# EAGLE board mkf434_ME433_HW2PenguinSchematic (EAGLE 8.1.0)
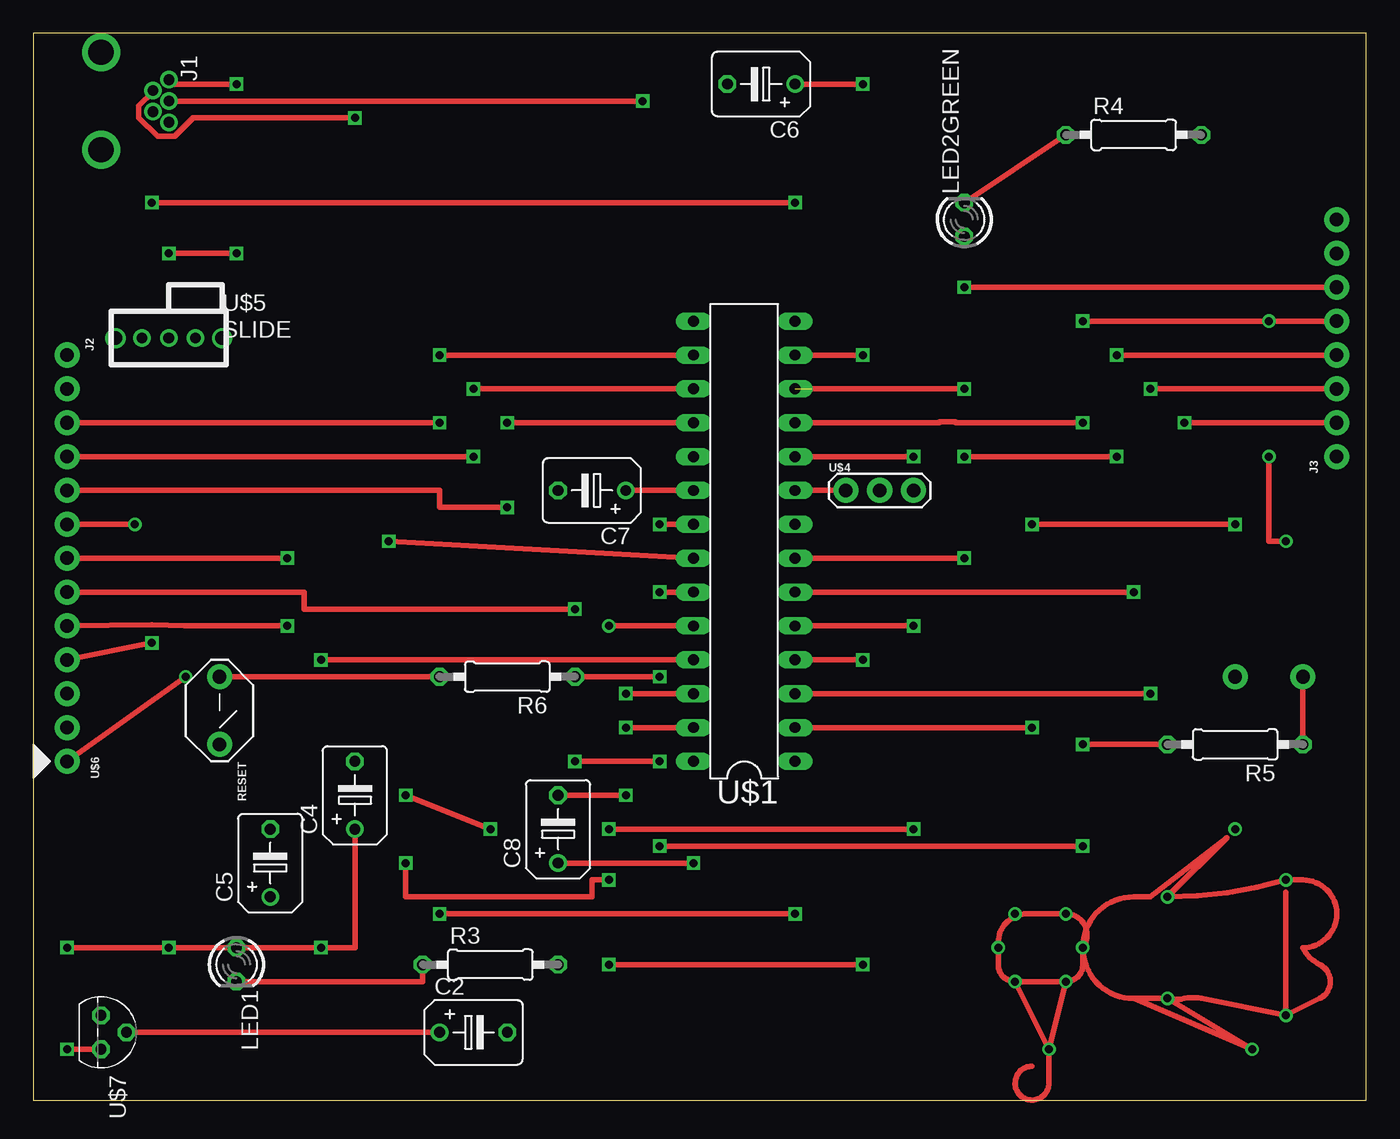
[diagram p0: board, top side]
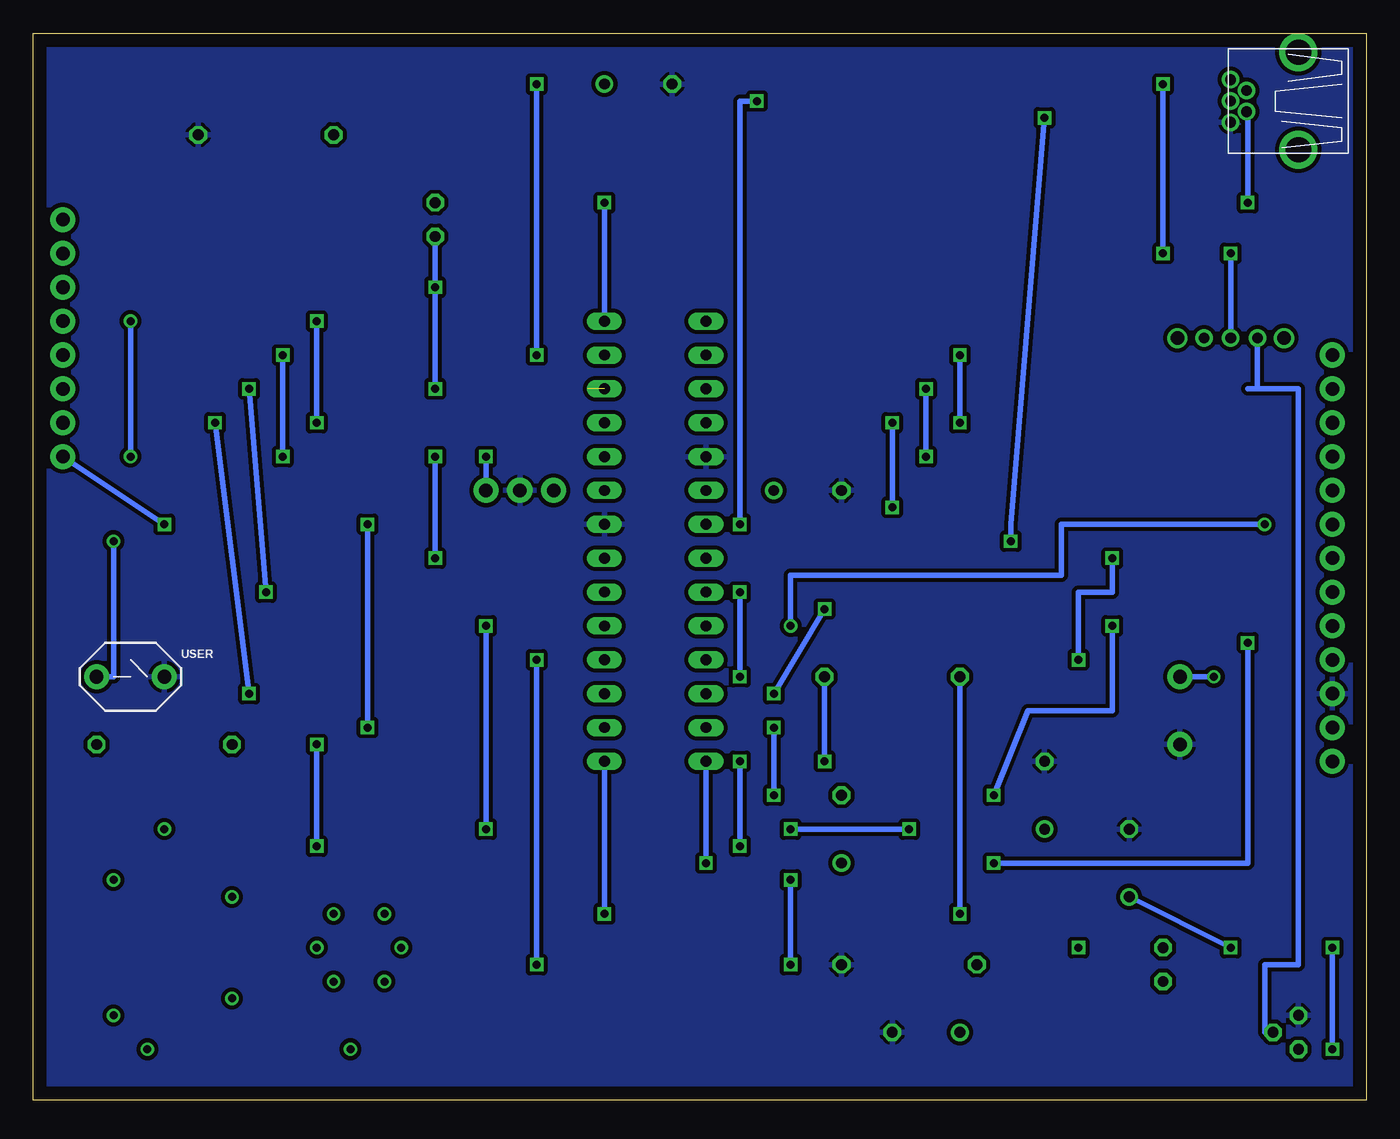
[diagram p1: board, bottom side, seen from below]

Size 100 x 80 mm. Coordinates in mm from the lower left corner, seen from the top.
Outline: 0,0 100,0 100,80 0,80 0,0
Copper layers (1*16): Top 0.035mm / dielectric 1.5mm / Bottom 0.035mm
Design rules "default": minimum track width 10mil, minimum drill 24mil, track to track 8mil, track to pad 8mil, pad to pad 8mil, via to via 8mil, smd to smd 8mil, copper to edge 40mil, drill to drill 8mil, minimum pad ring 10mil, minimum via ring 8mil, stop-mask expansion 4mil, vias tented up to drill 0mil, thermal gap 10mil

## Footprints (pad centres in the part's own frame; a part is rotated, then mirrored left to right if it is on the bottom)
B45181B = drill 0.813: + -2.54,0 | drill 0.813 octagon: - 2.54,0
USB-MB-H = drill 0.8: D+ 5.1,0; D- 3.9,0.8; GND 5.1,-1.6; ID 3.9,-0.8; VBUS 5.1,1.6 | drill 1.9: P$6 0,-3.65; P$7 0,3.65
1X08 = drill 1.016 pad 1.88: 1 0,0; 2 2.54,0; 3 5.08,0; 4 7.62,0; 5 10.16,0; 6 12.7,0; 7 15.24,0; 8 17.78,0
LED3MM = drill 0.813 octagon: A -1.27,0; K 1.27,0
0207/10 = drill 0.813 octagon: 1 -5.08,0; 2 5.08,0
PB = drill 1.016 pad 1.88: 1 -2.54,0; 2 2.54,0
DIL28-3 = drill 0.813 long: 1 -16.51,-3.81; 2 -13.97,-3.81; 3 -11.43,-3.81; 4 -8.89,-3.81; 5 -6.35,-3.81; 6 -3.81,-3.81; 7 -1.27,-3.81; 8 1.27,-3.81; 9 3.81,-3.81; 10 6.35,-3.81; 11 8.89,-3.81; 12 11.43,-3.81; 13 13.97,-3.81; 14 16.51,-3.81; 15 16.51,3.81; 16 13.97,3.81; 17 11.43,3.81; 18 8.89,3.81; 19 6.35,3.81; 20 3.81,3.81; 21 1.27,3.81; 22 -1.27,3.81; 23 -3.81,3.81; 24 -6.35,3.81; 25 -8.89,3.81; 26 -11.43,3.81; 27 -13.97,3.81; 28 -16.51,3.81
OSC = drill 1.016 pad 1.88: 1 -2.54,0; 2 0,0; 3 2.54,0
SLIDE = drill 0.8: 1. -2,0; 2. 0,0; 3. 2,0 | drill 1: P$1 -4,0; P$2 4,0
1X05 = drill 1.016 pad 1.88: 1 0,0; 2 2.54,0; 3 5.08,0; 4 7.62,0; 5 10.16,0
TO92 = drill 0.813 octagon: 1 -1.27,0; 2 0,1.905; 3 1.27,0

## Placement (x,y rotation side)
C2  0.1uF  [B45181B]  33.02,5.08 0 top
C4  0.1uF  [B45181B]  24.13,22.86 90 top
C5  10uF  [B45181B]  17.78,17.78 90 top
C6  0.1uF  [B45181B]  54.61,76.2 180 top
C7  10uF  [B45181B]  41.91,45.72 180 top
C8  0.1uF  [B45181B]  39.37,20.32 90 top
J1  USB-MB-H  [USB-MB-H]  5.08,74.93 0 top
J2  [1X08]  2.54,55.88 270 top
J3  [1X08]  97.79,48.26 90 top
LED1  [LED3MM]  15.24,10.16 270 top
LED2GREEN  [LED3MM]  69.85,66.04 90 top
R3  330  [0207/10]  34.29,10.16 0 top
R4  330  [0207/10]  82.55,72.39 0 top
R5  10k  [0207/10]  90.17,26.67 180 top
R6  10k  [0207/10]  35.56,31.75 180 top
RESET  PB  [PB]  13.97,29.21 270 top
U$1  PIC32MX250F128B  [DIL28-3]  53.34,41.91 90 top
U$4  [OSC]  63.5,45.72 0 top
U$5  SLIDE  [SLIDE]  10.16,57.15 0 top
U$6  PICKIT3  [1X05]  2.54,25.4 90 top
U$7  MCP1702  [TO92]  5.08,5.08 270 top
USER  PB  [PB]  92.71,31.75 0 bottom

## Library data of the parts
C2 C4-C8 J1 R3-R6 RESET U$1 U$4-U$7 USER = HW2_LIB
J2 J3 = HW2_LIB; PROD_ID: CONN-08438
LED1 LED2GREEN = led

## Nets
+3V3: R5.2 R6.1 U$1.23
+5V: U$1.15
A0: J3.1 U$1.2
A1: J3.2 U$1.3
A4/LED: J3.6 LED2GREEN.A U$1.12
B2: J3.3 U$1.6
B3: J3.4 U$1.7
B4/USER: J3.5 R5.1 U$1.11 USER.1
B7: J2.3 U$1.16
B8: J2.4 U$1.17
B9: J2.5 U$1.18
B13: J2.6 U$1.24
B14: J2.7 U$1.25
B15: J2.8 U$1.26
D+: J1.D+ U$1.21
D-: J1.D- U$1.22
GND: C2.- C4.- C5.- C6.- C7.- J1.GND R3.2 R4.2 RESET.2 U$1.8 U$1.19 U$4.2 U$6.3 U$7.1 USER.2
ID: J1.ID U$1.14
MCLR: R6.2 RESET.1 U$1.1 U$6.1
N$1: J1.VBUS U$5.2.
N$2: C2.+ U$5.1. U$7.2
N$3: C4.+ C5.+ LED1.A U$7.3
N$4: LED1.K R3.1
N$5: LED2GREEN.K R4.1
N$6: J2.1
N$7: J2.2
N$10: U$6.2
N$11: C6.+ U$1.13
N$12: C7.+ U$1.20
N$13: C8.+ U$1.28
N$14: J3.7
N$15: J3.8
N$16: C8.- U$1.27
OSC1: U$1.9 U$4.1
OSC2: U$1.10 U$4.3
PGC: U$1.5 U$6.5
PGD: U$1.4 U$6.4

## Tracks (layer width: path | path; a pad name or v marks a point on that pad's centre or on a via)
+3V3  (via drill 0.6)
  Top 0.406: R5.2 v78.74,26.67 | v78.74,19.05 v46.99,19.05 | v46.99,25.4 v40.64,25.4 | R6.1 v46.99,31.75 | v46.99,38.1 U$1.23
  Bottom 0.406: v78.74,26.67 v78.74,19.05 | v46.99,19.05 v46.99,25.4 | v40.64,25.4 R6.1 | v46.99,31.75 v46.99,38.1
A0  (via drill 0.6)
  Top 0.406: v90.17,43.18 v74.93,43.18 | v74.93,27.94 U$1.2
  Bottom 0.406: J3.1 v90.17,43.18 | v74.93,43.18 v74.93,27.94
A1  (via drill 0.6)
  Top 0.406: v83.82,30.48 U$1.3 | J3.2 v86.36,50.8
  Bottom 0.406: v86.36,50.8 v83.82,30.48
A4/LED  (via drill 0.6)  (1 unrouted)
  Top 0.406: v69.85,53.34 58.42,53.34 | J3.6 v69.85,60.96
  Bottom 0.406: LED2GREEN.A v69.85,60.96 v69.85,53.34
B2  (via drill 0.6)
  Top 0.406: J3.3 v83.82,53.34 | v82.55,38.1 U$1.6
  Bottom 0.406: v83.82,53.34 v82.55,38.1
B3  (via drill 0.6)
  Top 0.406: J3.4 v81.28,55.88 | v81.28,48.26 v69.85,48.26 | v69.85,40.64 U$1.7
  Bottom 0.406: v81.28,55.88 v81.28,48.26 | v69.85,48.26 v69.85,40.64
B4/USER  (via drill 0.6)
  Top 0.406: J3.5 v92.71,58.42 v78.74,58.42 | v78.74,50.8 69.21,50.8 69.14,50.88 68.02,50.88 67.95,50.8 U$1.11 | USER.1 R5.1 | v93.98,41.91 92.71,41.91 v92.71,48.26
  Bottom 0.406: v78.74,58.42 v78.74,50.8 | USER.1 93.98,31.75 v93.98,41.91 | v92.71,48.26 v92.71,58.42
B7  (via drill 0.6)
  Top 0.406: v30.48,55.88 U$1.16 | J2.3 v30.48,50.8
  Bottom 0.406: v30.48,50.8 v30.48,55.88
B8  (via drill 0.6)
  Top 0.406: v33.02,53.34 U$1.17 | J2.4 v33.02,48.26
  Bottom 0.406: v33.02,48.26 v33.02,53.34
B9  (via drill 0.6)
  Top 0.406: v35.56,50.8 U$1.18 | J2.5 30.48,45.72 30.48,44.45 v35.56,44.45
  Bottom 0.406: v35.56,44.45 v35.56,50.8
B13  (via drill 0.6)
  Top 0.406: v7.62,43.18 J2.6 | U$1.24 v43.18,35.56
  Bottom 0.406: v43.18,35.56 43.18,39.37 22.86,39.37 22.86,43.18 v7.62,43.18
B14  (via drill 0.6)
  Top 0.406: v21.59,33.02 U$1.25 | v19.05,40.64 J2.7
  Bottom 0.406: v21.59,33.02 21.59,38.1 19.05,38.1 v19.05,40.64
B15  (via drill 0.6)
  Top 0.406: v44.45,30.48 U$1.26 | v40.64,36.83 20.32,36.83 20.32,38.1 J2.8
  Bottom 0.406: v40.64,36.83 v44.45,30.48
D+  (via drill 0.6)
  Top 0.406: J1.D+ v45.72,74.93 | v46.99,43.18 U$1.21
  Bottom 0.406: v45.72,74.93 46.99,74.93 v46.99,43.18
D-  (via drill 0.6)
  Top 0.406: U$1.22 v26.67,41.91 | v24.13,73.66 12.01,73.66 10.62,72.27 9.34,72.27 7.92,73.69 7.92,74.57 8.98,75.63 J1.D-
  Bottom 0.406: v26.67,41.91 26.67,43.18 v24.13,73.66
GND
  pour Bottom (isolate 0.305): 0,80.01 0,0 100.33,0 100.33,80.01
ID  (via drill 0.6)
  Top 0.406: v8.89,67.31 v57.15,67.31
  Bottom 0.406: J1.ID 8.89,74.13 v8.89,67.31 | v57.15,67.31 U$1.14
MCLR  (via drill 0.6)
  Top 0.406: R6.2 RESET.1 | v30.48,13.97 v57.15,13.97 | v11.43,31.75 U$6.1
  Bottom 0.406: R6.2 v30.48,13.97 | v57.15,13.97 U$1.1 | RESET.1 v11.43,31.75
N$1  (via drill 0.6)
  Top 0.406: v10.16,63.5 v15.24,63.5 | v15.24,76.2 10.18,76.2 J1.VBUS
  Bottom 0.406: U$5.2. v10.16,63.5 | v15.24,63.5 v15.24,76.2
N$2
  Top 0.406: U$7.2 C2.+
  Bottom 0.406: U$7.2 7.62,5.08 7.62,10.16 5.08,10.16 5.08,53.34 8.89,53.34 8.16,53.34 U$5.1.
N$3  (via drill 0.6)
  Top 0.406: v2.54,3.81 U$7.3 | v2.54,11.43 v10.16,11.43 LED1.A v21.59,11.43 24.13,11.43 C4.+
  Bottom 0.406: v10.16,11.43 C5.+ | v2.54,11.43 v2.54,3.81
N$4
  Top 0.406: LED1.K 29.21,8.89 R3.1
N$5
  Top 0.406: R4.1 LED2GREEN.K
N$8  (via drill 0.6)
  other vias: 73.66,13.97
N$9  (via drill 0.6)
  Top 0.406: v72.39,11.43 72.39,10.16 arc90 73.66,8.89 77.47,8.89
N$11  (via drill 0.6)
  Top 0.406: C6.+ v62.23,76.2 | v62.23,55.88 U$1.13
  Bottom 0.406: v62.23,76.2 v62.23,55.88
N$12
  Top 0.406: C7.+ U$1.20
N$13  (via drill 0.6)
  Top 0.406: C8.+ v49.53,17.78
  Bottom 0.406: v49.53,17.78 U$1.28
N$16  (via drill 0.6)
  Top 0.406: C8.- v44.45,22.86 | v44.45,27.94 U$1.27
  Bottom 0.406: v44.45,22.86 v44.45,27.94
N$17  (via drill 0.6)
  Top 0.406: v73.66,8.89 76.2,3.81
N$18  (via drill 0.6)
  Top 0.406: 78.74,11.43 78.74,10.16 arc-90 v77.47,8.89 76.2,3.81
N$19  (via drill 0.6)
  Top 0.406: v78.74,11.43 arc90 82.55,7.62 85.09,7.62
N$20  (via drill 0.6)
  Top 0.406: 72.39,11.43 72.39,11.79 arc-90 74.57,13.97 v77.47,13.97 arc-127 78.74,11.43
N$21  (via drill 0.6)
  Top 0.406: 74.93,2.54 arc270 76.2,1.27 v76.2,3.81
N$22  (via drill 0.6)
  Top 0.406: v93.98,6.35 87.63,7.62 arc23 86.36,7.62 arc-23 85.09,7.62 | v93.98,6.35 93.98,15.6 | v93.98,6.35 96.52,7.62 arc127 96.52,10.16 arc-37 95.25,11.43
N$23  (via drill 0.6)
  Top 0.406: v93.98,16.51 95.25,16.51 arc-180 95.25,11.43
N$24  (via drill 0.6)
  Top 0.406: 78.74,11.43 arc-90 82.55,15.24 83.82,15.24 89.53,19.68 v85.09,15.24 arc16 93.98,16.51
N$25  (via drill 0.6)
  Top 0.406: v85.09,7.62 91.44,3.81 82.55,7.62
N$26  (via drill 0.6)
  other vias: 91.44,3.81
N$27  (via drill 0.6)
  other vias: 90.17,20.32
OSC1
  Top 0.406: U$4.1 U$1.9
OSC2  (via drill 0.6)
  Top 0.406: U$1.10 v66.04,48.26
  Bottom 0.406: v66.04,48.26 U$4.3
PGC  (via drill 0.6)
  Top 0.406: U$1.5 v66.04,35.56 | v66.04,20.32 v43.18,20.32 | v19.05,35.56 11.35,35.56 8.89,35.64 U$6.5 | v34.29,20.32 v27.94,22.86
  Bottom 0.406: v66.04,35.56 v66.04,20.32 | v43.18,20.32 v34.29,20.32 | v27.94,22.86 25.4,29.21 19.05,29.21 v19.05,35.56
PGD  (via drill 0.6)
  Top 0.406: U$1.4 v62.23,33.02 | v62.23,10.16 v43.18,10.16 | v43.18,16.51 41.91,16.51 41.91,15.24 27.94,15.24 v27.94,17.78 | v8.89,34.29 U$6.4
  Bottom 0.406: v62.23,33.02 v62.23,10.16 | v43.18,10.16 v43.18,16.51 | v27.94,17.78 8.89,17.78 v8.89,34.29